# Altium PCB 火灾报警装置.PcbDoc
Units mil, origin at the board's own origin, x right, y up, seen from the top; angles counter-clockwise.
Board outline 5950 x 3885 mil, 2 copper layers (Top Layer, Bottom Layer); 33 components, 40 nets, 153 pads, 0 vias.
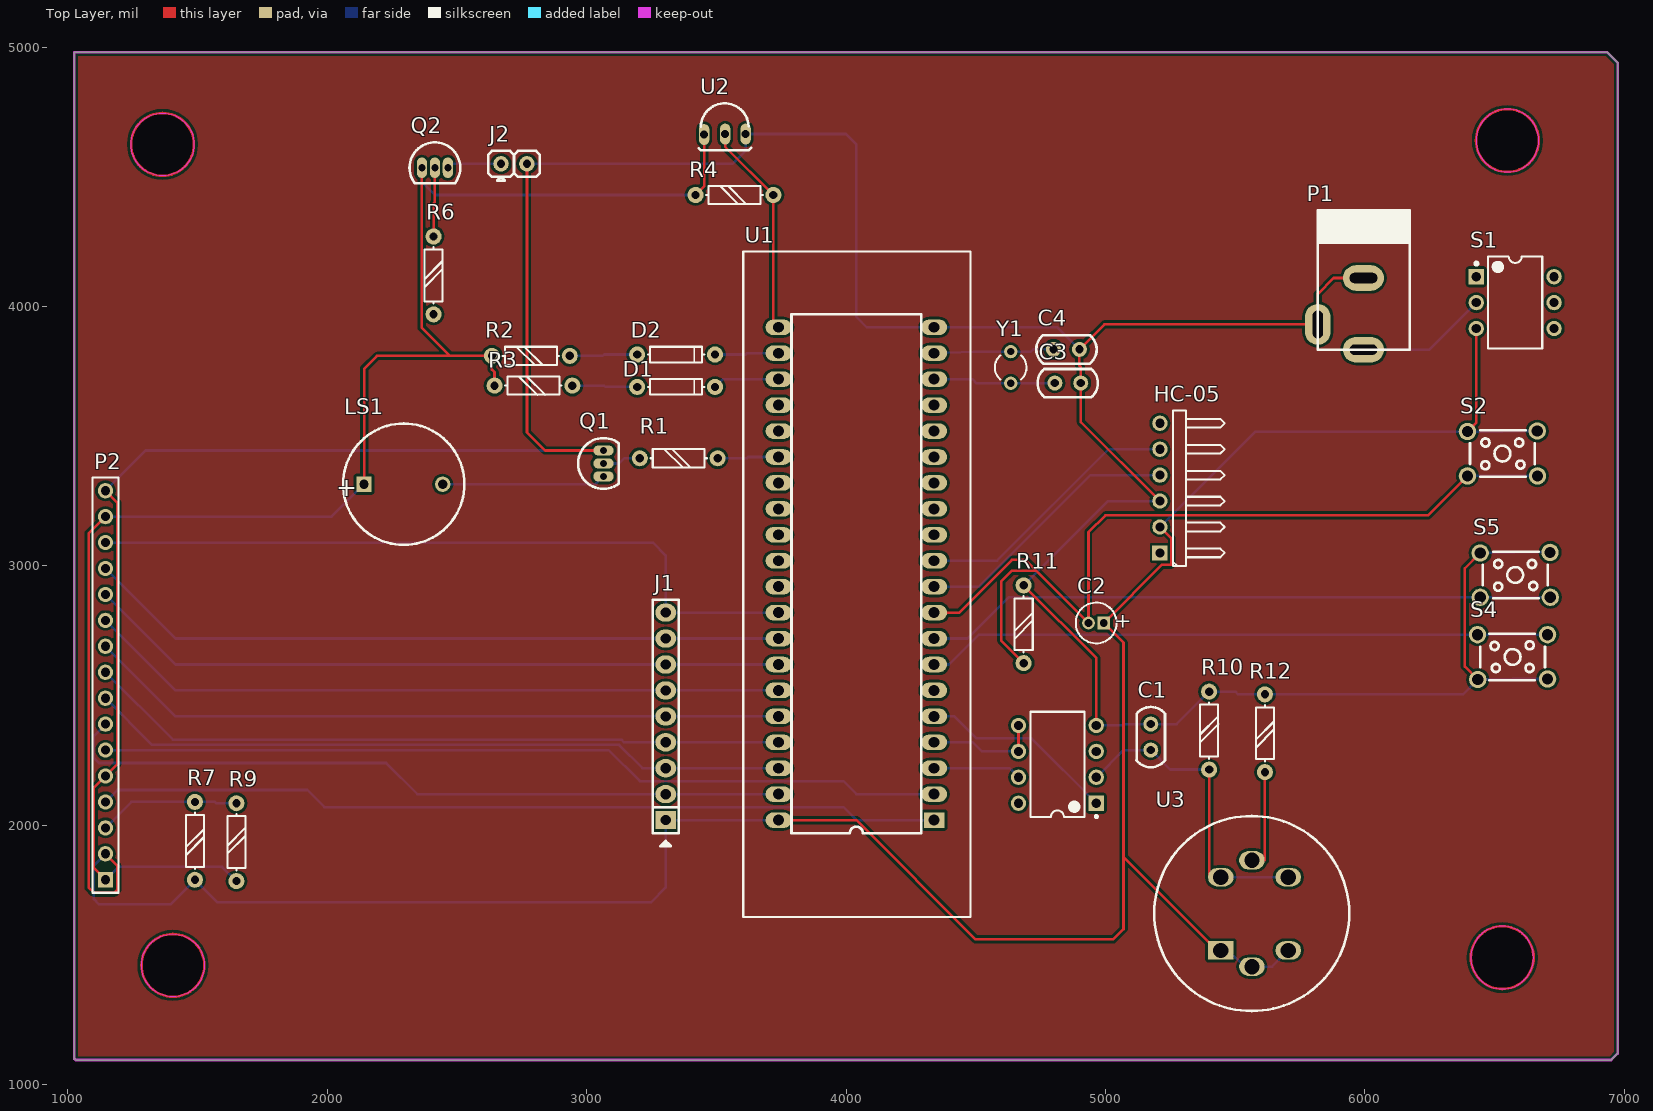
[diagram p0: Top Layer view]
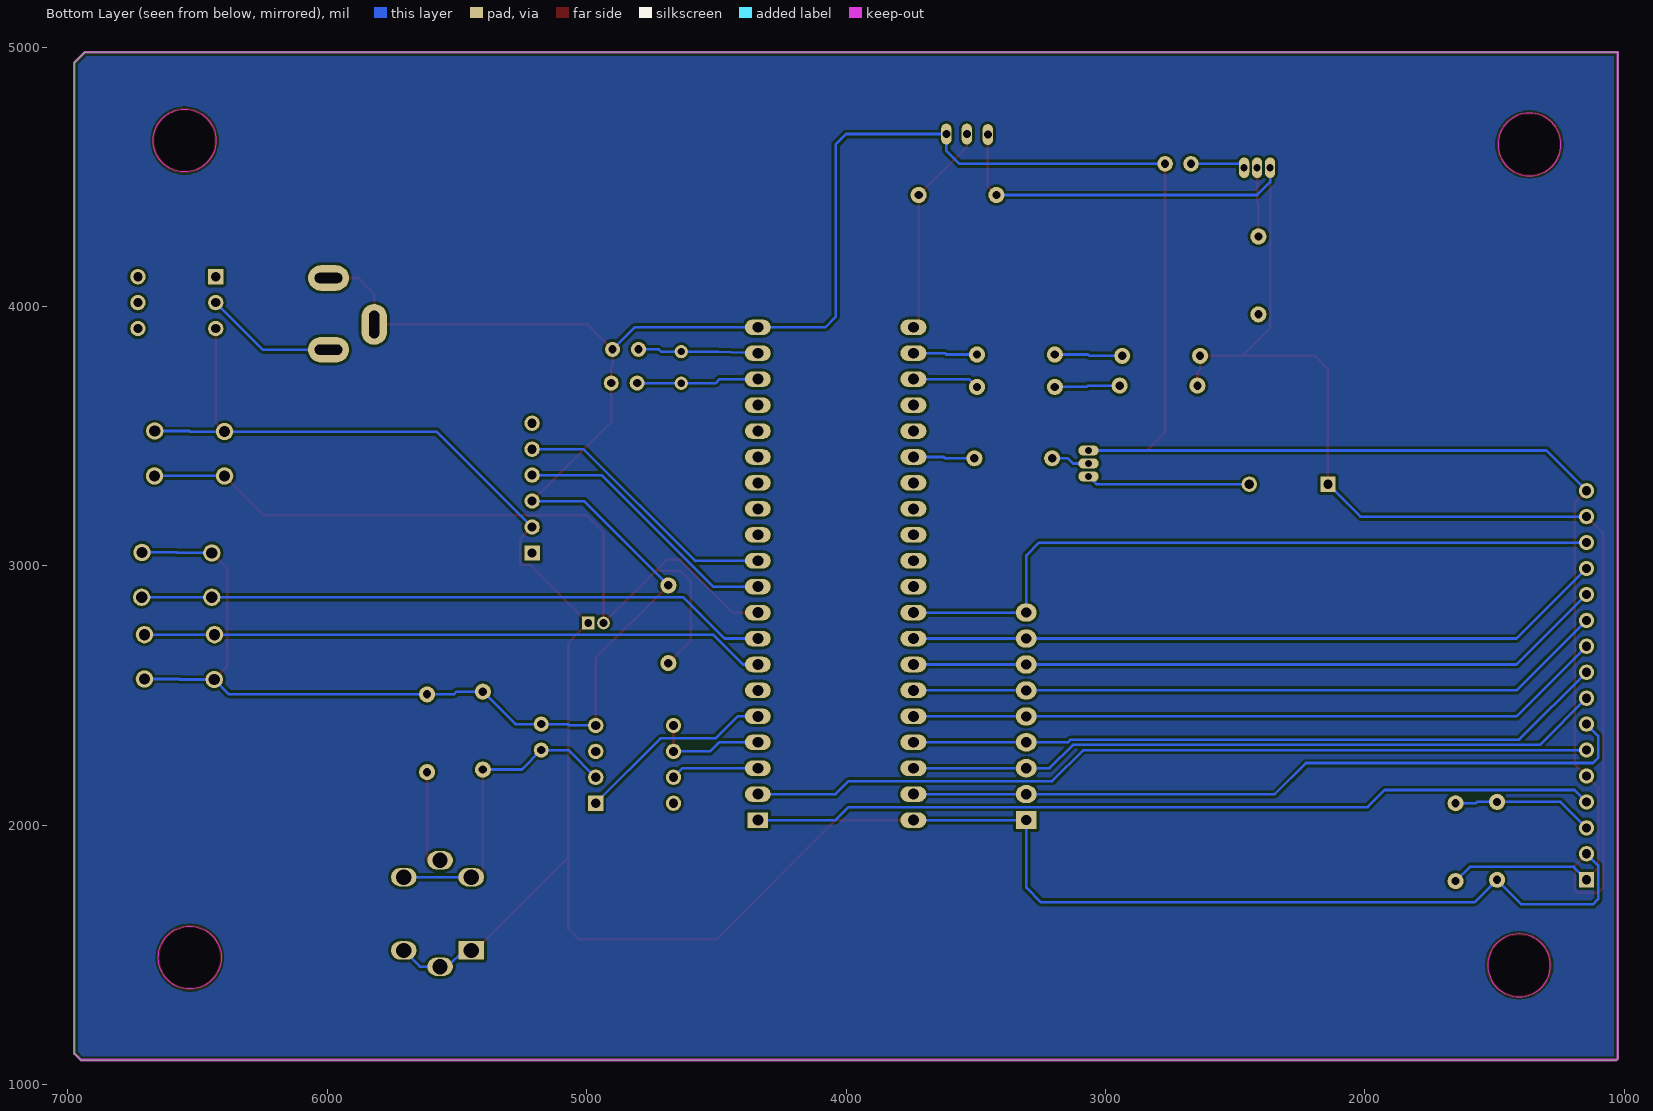
[diagram p1: Bottom Layer view, seen from below]
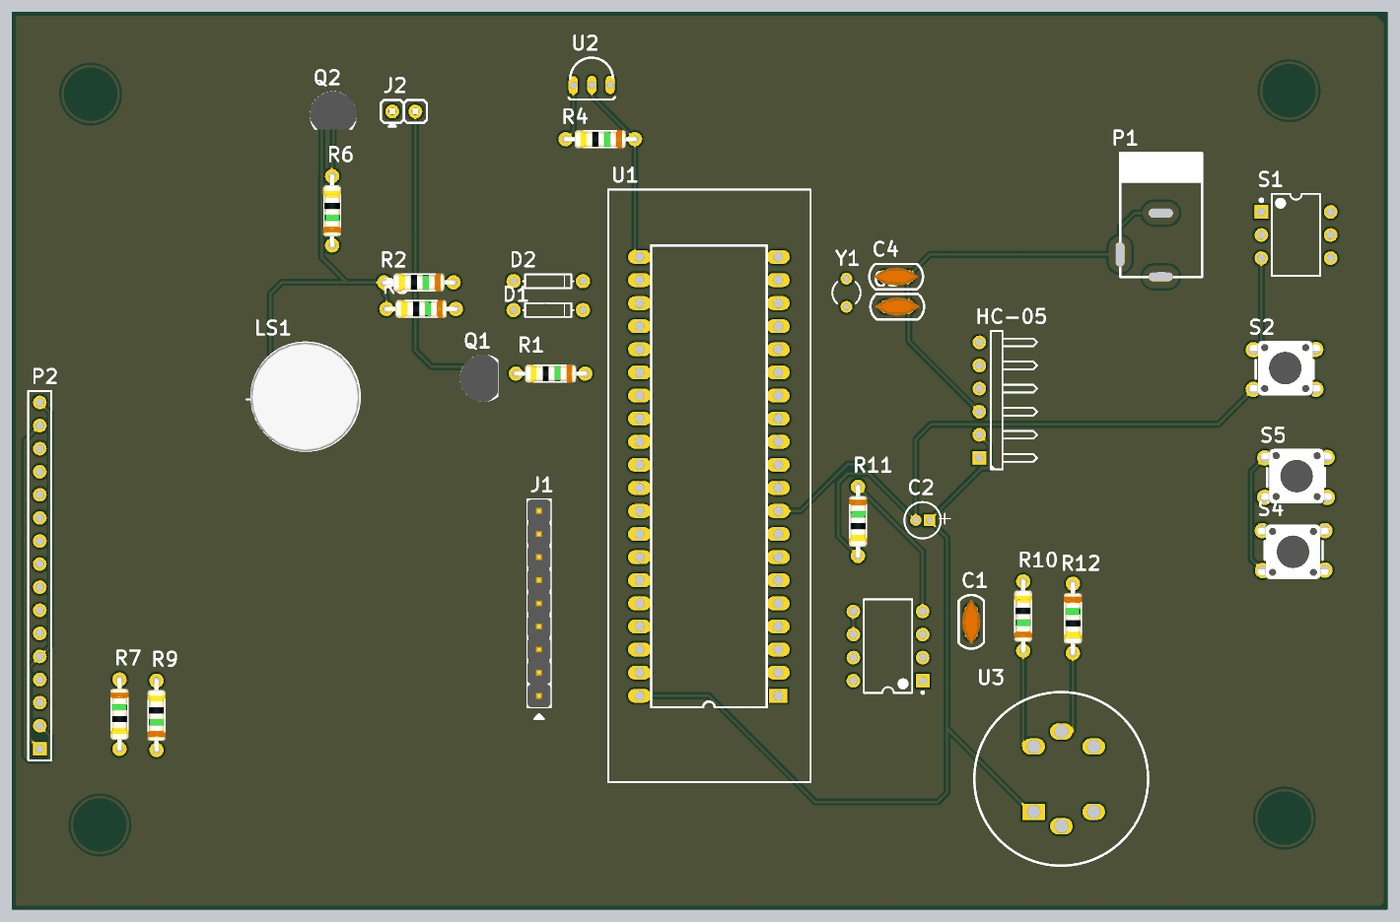
[diagram p2: 3D render of the assembled board from above, using the file's embedded part models]

## Layer stack, top to bottom
Top Solder: solder mask 0.4, Solder Resist, Dk 3.5
Top Layer: signal copper 1.4
Dielectric 1: dielectric 12.6, FR-4, Dk 4.8
Bottom Layer: signal copper 1.4
Bottom Solder: solder mask 0.4, Solder Resist, Dk 3.5

## Board outline
1030,1095 1025,1100 1025,4980 6935,4980 6975,4940 6975,1120 6950,1095
cut-out: 6408.96,1490 ccw(c6530,1490) 6530,1368.96 ccw(c6530,1490) 6651.04,1490 ccw(c6530,1490) 6530,1611.04 ccw(c6530,1490)
cut-out: 1405,1338.96 cw(c1405,1460) 1283.96,1460 cw(c1405,1460) 1405,1581.04 cw(c1405,1460) 1526.04,1460 cw(c1405,1460)
cut-out: 6428.96,4640 ccw(c6550,4640) 6550,4518.96 ccw(c6550,4640) 6671.04,4640 ccw(c6550,4640) 6550,4761.04 ccw(c6550,4640)
cut-out: 1365,4503.96 cw(c1365,4625) 1243.96,4625 cw(c1365,4625) 1365,4746.04 cw(c1365,4625) 1486.04,4625 cw(c1365,4625)

## Design rules (kind name [scope] priority, off if disabled: settings)
Clearance [All] p1: gap=10 ignorepadtopadclearanceinfootprint=FALSE except(0: Arc-Hole Track-Hole SMDPad-Hole THPad-Hole Via-Hole Fill-Hole Poly-Hole Region-Hole Text-Hole)
PolygonConnect [All] p1: connectstyle=Relief reliefconductorwidth=10 reliefentries=4 polygonreliefangle="90 Angle" airgapwidth=10
RoutingVias [All] p1: holewidth=28 width=50 viastyle="Through Hole" minholewidth=28 minwidth=50 maxholewidth=28 maxwidth=50
SolderMaskExpansion [All] p1: expansion=4
Width [All] p1: maxlimit=10 minlimit=10 preferedwidth=10
30 further rules are at their usual default settings.

## Components (designator, comment, footprint, x,y, rotation, side; value= is the part's Value field where it differs from the comment)
C1 "Cap" CAP-0.1 5175,2340 r270 top value=104
C2 "Cap Pol1" CAPPR1.5-4X5 4964.53,2780 r180 top value=10uF
C3 "Cap" CAP-0.1 4855,3705 r180 top value=100pF
C4 "Cap" CAP-0.1 4850,3835 r180 top value=100pF
D1 "LED1" DIODE-0.3 3495,3690 r0 top
D2 "LED2" DIODE-0.3 3495,3815 r0 top
HC-05 "Header 6H" HDR1X6H 5210,3050 r90 top
J1 "10K" PIN-9-2.54-1.0 3305,2420 r90 top
J2 "接线端子" SIP-2 2720,4550 r0 top
LS1 "BUZZ" BUZZER_12*9.5 2445,3315 r180 top
P1 "POWER" 7257-3 5995,4110 r0 top
P2 "1602" HDR1X16 1145,1790 r90 top
Q1 "9012" TO-92(TO-92-3) 3065,3395 r90 top
Q2 "8550" TO-92(TO-92-3) 2415,4535 r0 top
R1 "2.2K" AXIAL-0.3 3505,3415 r180 top
R2 "1K" AXIAL-0.3 2935,3810 r180 top
R3 "2.2K" AXIAL-0.3 2945,3695 r180 top
R4 "10K" AXIAL-0.3 3720,4430 r180 top
R6 "1K" AXIAL-0.3 2410,3970 r90 top
R7 "10K" AXIAL-0.3 1490,2090 r270 top
R9 "470" AXIAL-0.3 1650,1785 r90 top
R10 "470" AXIAL-0.3 5400,2215 r90 top
R11 "10K" AXIAL-0.3 4685,2925 r270 top
R12 "5.1" AXIAL-0.3 5615,2505 r270 top
S1 "SW DIP-3" DIP-6 6580,4015 r0 top
S2 "Tactile Switch" BUTTON_6*6 6395.63,3518 r0 top
S4 "Tactile Switch" BUTTON_6*6 6705,2564 r180 top
S5 "Tactile Switch" BUTTON_6*6 6445,3050 r0 top
U1 "89C51/52" "dip40 - 紧缩座" 4340,2020 r180 top
U2 "DS18B20" TO-92 3535,4665 r270 top
U3 "MQ-2" MQ-2 5575,1660 r0 top
Y1 "12MHZ" R38 4635,3765 r180 top
? "ADC0832" N08E 4815,2235 r180 top

## Footprints (in the part's own frame and the unit in brackets; to place one, negate y for a bottom-side part, rotate by r counter-clockwise, add the part's x,y. Pads: shape width x height; smd on the part's side, far side on the other; paste and mask are expansions set on the pad)
7257-3 [mm]
  oval 4x2.5 hole 1 slot 2.7 at 0 deg: 1(0,-7.018) 3(0,0)
  oval 2.5x4 hole 1 slot 2.7 at 90 deg: 2(-4.47,-4.547)
  silkscreen extent -4.47,-7.02 4.52,6.65
AXIAL-0.3 [mil] "1/8W电阻"
  round 62 hole 32: 1(0,0) 2(300,0)
  silkscreen extent 41,-35 259,35, body extent -10,-39 310,39, height 89
BUTTON_6*6 [mm] "轻触按键"
  round 1.7 hole 1.1: 1(0,0) 1(6.842,0.051) 2(0,-4.343) 2(6.867,-4.343)
  silkscreen extent 0.25,-4.44 6.6,0.13, body extent -0.48,-5.01 7.49,0.99, height 5.26
BUZZER_12*9.5 [mm] "12*9.5mm"
  rect 1.5x1.5 hole 0.9: 1(7.696,0)
  round 1.5 hole 0.9: 2(0,0)
  silkscreen extent -2.13,-5.94 9.75,5.94, body extent -2.14,-5.97 9.86,6.02, height 7.5
CAP-0.1 [mil] "瓷片电容"
  round 58 hole 31.5: 1(-50,0) 2(50,0)
  silkscreen extent -116,-55 116,55, body extent -97,-39 97,39, height 226
CAPPR1.5-4X5 [mm]
  rect 1.25x1.25 hole 0.75: 1(-0.75,0)
  round 1.25 hole 0.75: 2(0.75,0)
  silkscreen extent -2,-2 2,2, body extent -2,-2 2,2, height 5
DIODE-0.3 [mil]
  round 62 hole 32: 1(-300,0) 2(0,0)
  silkscreen extent -259,-30 -41,30
"dip40 - 紧缩座" [mil]
  rect 80x60 hole 42: 1(0,0)
  oval 100x60 hole 42: 2(0,-100) 3(0,-200) 4(0,-300) 5(0,-400) 6(0,-500) 7(0,-600) 8(0,-700) 9(0,-800) 10(0,-900) 11(0,-1000) 12(0,-1100) 13(0,-1200) 14(0,-1300) 15(0,-1400) 16(0,-1500) 17(0,-1600) 18(0,-1700) 19(0,-1800) 20(0,-1900) 21(600,-1900) 22(600,-1800) 23(600,-1700) 24(600,-1600) 25(600,-1500) 26(600,-1400) 27(600,-1300) 28(600,-1200) 29(600,-1100) 30(600,-1000) 31(600,-900) 32(600,-800) 33(600,-700) 34(600,-600) 35(600,-500) 36(600,-400) 37(600,-300) 38(600,-200) 39(600,-100) 40(600,0)
  silkscreen extent -140,-2192 736,374
DIP-6 [mm]
  rect 1.5x1.5 hole 0.9: 1(-3.81,2.54)
  round 1.5 hole 0.9: 2(-3.81,0) 3(-3.81,-2.54) 4(3.81,-2.54) 5(3.81,0) 6(3.81,2.54)
  silkscreen extent -3.95,-4.5 2.65,4.53
HDR1X6H [mm] "Connector; Header; 6 Position; Right Angle"
  rect 1.5x1.5 hole 0.9: 1(0,0)
  round 1.5 hole 0.9: 2(2.54,0) 3(5.08,0) 4(7.62,0) 5(10.16,0) 6(12.7,0)
  silkscreen extent -1.27,-6.35 13.97,-1.27
HDR1X16 [mm] "Connector; Header; 16 Position"
  rect 1.5x1.5 hole 0.9: 1(0,0)
  round 1.5 hole 0.9: 2(2.54,0) 3(5.08,0) 4(7.62,0) 5(10.16,0) 6(12.7,0) 7(15.24,0) 8(17.78,0) 9(20.32,0) 10(22.86,0) 11(25.4,0) 12(27.94,0) 13(30.48,0) 14(33.02,0) 15(35.56,0) 16(38.1,0)
  silkscreen extent -1.27,-1.27 39.37,1.27
MQ-2 [mm] "MQ-2烟雾传感器"
  rect 2.5x1.8 hole 1.5: 1(-3.302,-3.617)
  oval 2.5x1.8 hole 1.5: 2(-0.254,-5.207) 3(3.302,-3.617) 4(3.302,3.556) 5(-0.254,5.207) 6(-3.302,3.556)
  silkscreen extent -9.82,-9.55 9.27,9.55
N08E [mm] "DIP, 8-Leads, Row Spacing 7.62mm, Pitch 2.54mm, Body 9.91x6.35mm"
  rect 1.5x1.5 hole 0.9: 1(-3.81,3.81)
  round 1.5 hole 0.9: 2(-3.81,1.27) 3(-3.81,-1.27) 4(-3.81,-3.81) 5(3.81,-3.81) 6(3.81,-1.27) 7(3.81,1.27) 8(3.81,3.81)
  silkscreen extent -3.94,-5.15 2.65,5.23, body extent -3.6,-5.15 3.6,5.15, height 5.34
PIN-9-2.54-1.0 [mil] "Pin Header"
  rect 70x80 hole 39.37: 1(-400,0)
  oval 70x80 hole 39.37: 2(-300,0) 3(-200,0) 4(-100,0) 5(0,0) 6(100,0) 7(200,0) 8(300,0) 9(400,0)
  silkscreen extent -500,-50 450,50, body extent -450,-50 450,50, height 398
R38 [mm] "Crystal, Thru-Hole; 2 Leads; Body 3.1 x 8.2 mm (Dia.xH)"
  round 1.3 hole 0.7: 1(0,1.55) 2(0,-1.55)
  silkscreen extent -1.55,-1.19 1.55,1.17
SIP-2 [mil]
  round 60 hole 32: 1(-50,0) 2(50,0)
  silkscreen extent -100,-65 100,50, body extent -100,-50 100,50, height 336
TO-92 [mil] "EBC"
  oval 80x40 hole 30: 1(0,78) 2(0,-1) 3(2,-82)
  silkscreen extent -118,-102 63,99
TO-92(TO-92-3) [mm]
  oval 1x2 hole 0.7 mask+0.051: 1(-1.27,0) 2(0,0) 3(1.27,0)
  silkscreen extent -2.48,-1.5 2.48,2.48, body extent -2.61,-1.6 2.61,2.6, height 8

## Part data
C1 C3 C4: "Capacitor", LatestRevisionDate=17-Jul-2002, LatestRevisionNote="Re-released for DXP Platform.", PackageDescription="Radial Cap, Thru-Hole; 2 Leads; 0.3 in Pin Spacing", PackageReference=RAD-0.3, Published=8-Jun-2000, Publisher="Altium Limited"
C2: "Polarized Capacitor (Radial)", LatestRevisionDate=17-Jul-2002, LatestRevisionNote="Re-released for DXP Platform.", PackageDescription="Polarized Capacitor (Radial); 2 Leads", PackageReference=RB7.6-15, Published=8-Jun-2000, Publisher="Altium Limited"
D1 D2: library part LED0, "Typical INFRARED GaAs LED", LatestRevisionDate=08-Jul-2005, LatestRevisionNote="Mech Layer 1 removed.", PackageDescription="LED; 2 Leads", PackageReference=LED-0, Published=8-Jun-2000, Publisher="Altium Limited"
HC-05: "Header, 6-Pin, Right Angle", LatestRevisionDate=17-Jul-2002, LatestRevisionNote="Re-released for DXP Platform.", Publisher="Altium Limited"
J1: library part CON9, "Connector"
J2: library part CON2, "Connector"
LS1: "蜂鸣器"
P2: library part "Header 16", "Header, 16-Pin", LatestRevisionDate=17-Jul-2002, LatestRevisionNote="Re-released for DXP Platform.", Publisher="Altium Limited"
Q1: library part 9012_TO-92, "PNP型小功率三极管", datasheet=http://pdf1.alldatasheetcn.com/datasheet-pdf/view/311757/DAYA/9012.html
Q2: library part 8550_TO-92, "PNP型小功率三极管", HelpURL=https://baike.baidu.com/item/%E4%B8%89%E6%9E%81%E7%AE%A18550/862606
R1 R2 R3 R4 R6 R7 R9 R10 R11 R12: library part R
S1: "DIP Switch, 3 Position, SPST", Code_JEDEC=MO-001-AM, LatestRevisionDate=17-Jul-2002, LatestRevisionNote="Re-released for DXP Platform.", PackageReference=DIP-6, Published=24-Mar-1999, Publisher="Altium Limited"
S2 S4 S5: library part SW-PB, "Tactile Switch触觉开关", LatestRevisionDate=17-Jul-2002, LatestRevisionNote="Re-released for DXP Platform.", PackageReference=SPST-2, Published=24-Mar-1999, Publisher="Altium Limited"
U1: library part AT89C51
U3: "MQ-2 气体传感器"
Y1: library part XTAL, "Crystal Oscillator", LatestRevisionDate=17-Jul-2002, LatestRevisionNote="Re-released for DXP Platform.", PackageDescription="Crystal, Thru-Hole; 2 Leads; Body 3.1 x 8.2 mm (Dia.xH)", PackageReference=R38, Published=8-Jun-2000, Publisher="Altium Limited"

## Nets (pads, with @x,y where several pads share a name; then routed paths per layer and width w, separated by ;. In a path a pad name is that pad's centre, name@x,y a point inside that pad or via, vN(x,y) a via of type N, cw(c..) or ccw(c..) an arc to the next point about the centre after c; other vN are vias at no path point)
GND: ?.4 C1.1 C3.1 C4.1 HC-05.3 J2.2 P1.2 P1.3 P2.1 P2.5 P2.16 Q1.3 R9.1 R10.2 R11.1 R12.1 S4.1 S5.1 U1.20 U2.1 | length 14348
  Top Layer w10: P2.1 1100,1835 1100,2145 P2.5 1190,2235 1190,3245 P2.16 ; J2.2 2770,3515 2840,3445 Q1.3 ; R11.1 4965,2645 ?.4 ; HC-05.3 4905,3555 C3.1 4905,3767 4900,3772 C4.1 4996,3931 P1.2 5819,4049 5880,4110 P1.3 ; S4.1@6435.63,2562 6386,2611.63 6386,2991 S5.1@6445,3050
  Bottom Layer w10: P2.1 1195,1840 1595,1840 R9.1 ; P2.16 1300,3445 Q1.3 ; J2.2 3563,4550 3613,4600 U2.1 4000,4665 4040,4625 4040,3960 4080,3920 U1.20 4815,3920 C4.1 ; R11.1 5010,3250 HC-05.3 ; ?.4 5067,2385 5072,2390 C1.1 5275,2390 R10.2 5502,2515 5512,2505 R12.1 6378.63,2505 6435.63,2562 6569,2562 6571,2564 S4.1@6705,2564 ; S5.1@6445,3050 6578,3050 6580,3052 S5.1@6714.37,3052
Net_1: ?.1 U1.5 | length 763.8
  Bottom Layer w10: U1.5 4418,2420 4503,2335 4715,2335 ?.1
Net_2: ?.2 C1.2 R10.1 U3.4 U3.6 | length 1229.6
  Top Layer w10: R10.1 5400,1800 U3.6
  Bottom Layer w10: ?.2 5070,2290 C1.2 5250,2215 R10.1 ; U3.6 U3.4
Net_5: ?.5 ?.6 U1.4 | length 439.5
  Top Layer w10: ?.6 ?.5
  Bottom Layer w10: U1.4 4489,2320 4524,2285 ?.6
Net_7: ?.7 U1.3 | length 339.5
  Bottom Layer w10: U1.3 4630,2220 ?.7
NetC2_2: C2.2 R11.2 S2.2 U1.9 | length 3453.2
  Top Layer w10: U1.9 4437,2820 4640,3023 4692,3023 4733,2982 ; R11.2 4599,2711 4599,2941 4640,2982 4733,2982 ; S2.2@6395.63,3347 6243.63,3195 5000,3195 4935,3130 C2.2 4733,2982
  Bottom Layer w10: S2.2@6395.63,3347 S2.2@6666,3347
NetC3_2: C3.2 U1.18 Y1.1 | length 472.1
  Bottom Layer w10: U1.18 4487,3720 4503.02,3703.98 Y1.1 4719,3703.98 4720.02,3705 C3.2
NetC4_2: C4.2 U1.19 Y1.2 | length 463.8
  Bottom Layer w10: U1.19 4493.02,3826.02 Y1.2 4713,3826.02 4721.98,3835 C4.2
NetD1_1: D1.1 R3.1 | length 252.1
  Bottom Layer w10: R3.1 3067,3695 3072,3690 D1.1
NetD1_2: D1.2 U1.23 | length 257.4
  Bottom Layer w10: D1.2 3525,3720 U1.23
NetD2_1: D2.1 R2.1 | length 262.1
  Bottom Layer w10: R2.1 3062,3810 3067,3815 D2.1
NetD2_2: D2.2 U1.22 | length 247.1
  Bottom Layer w10: D2.2 3613,3815 3618,3820 U1.22
NetHC-05_4: HC-05.4 U1.10 | length 1048.1
  Bottom Layer w10: U1.10 4512,2920 4942,3350 HC-05.4
NetHC-05_5: HC-05.5 U1.11 | length 1048.1
  Bottom Layer w10: U1.11 4583,3020 5013,3450 HC-05.5
NetJ1_2: J1.2 P2.7 U1.39 | length 2846.6
  Bottom Layer w10: P2.7 1100,2345 1100,2260 1120,2240 2227,2240 2347,2120 J1.2 U1.39
NetJ1_3: J1.3 P2.8 U1.38 | length 2706.8
  Bottom Layer w10: P2.8 1325,2310 3125,2310 3215,2220 J1.3 U1.38
NetJ1_4: J1.4 P2.9 U1.37 | length 2706.8
  Bottom Layer w10: P2.9 1405,2330 3134,2330 3144,2320 J1.4 U1.37
NetJ1_5: J1.5 P2.10 U1.36 | length 2706.8
  Bottom Layer w10: P2.10 1415,2420 J1.5 U1.36
NetJ1_6: J1.6 P2.11 U1.35 | length 2706.8
  Bottom Layer w10: P2.11 1415,2520 J1.6 U1.35
NetJ1_7: J1.7 P2.12 U1.34 | length 2706.8
  Bottom Layer w10: P2.12 1415,2620 J1.7 U1.34
NetJ1_8: J1.8 P2.13 U1.33 | length 2706.8
  Bottom Layer w10: P2.13 1415,2720 J1.8 U1.33
NetJ1_9: J1.9 P2.14 U1.32 | length 2835.7
  Bottom Layer w10: P2.14 3255,3090 3305,3040 J1.9 U1.32
NetJ2_1: J2.1 Q2.3 | length 220
  Bottom Layer w10: Q2.3 2465,4550 J2.1
NetLS1_2: LS1.2 Q1.1 | length 632.4
  Bottom Layer w10: LS1.2 3035,3315 Q1.1
NetP1_1: P1.1 S1.2 | length 510.1
  Bottom Layer w10: P1.1 6248.69,3833.69 S1.2
NetP2_3: P2.3 R7.1 R9.2 | length 548.5
  Bottom Layer w10: P2.3 1245,2090 R7.1 1567,2090 1572,2085 R9.2
NetP2_4: P2.4 U1.1 | length 3262.1
  Bottom Layer w10: P2.4 1191,2136 1923,2136 1989,2070 3990,2070 4040,2020 U1.1
NetP2_6: P2.6 U1.2 | length 3265.4
  Bottom Layer w10: P2.6 3085,2290 3205,2170 3990,2170 4040,2120 U1.2
NetQ1_2: Q1.2 R1.2 | length 148.3
  Bottom Layer w10: Q1.2 3125,3395 3145,3415 R1.2
NetQ2_2: Q2.2 R6.2 | length 267.1
  Top Layer w10: R6.2 2410,4398 2415,4403 Q2.2
NetQ3_2: 
NetQ3_3: R6.1
NetR1_1: R1.1 U1.26 | length 237.1
  Bottom Layer w10: R1.1 3618,3415 3623,3420 U1.26
NetR4_1: R4.1 U1.21 U2.2 | length 842
  Top Layer w10: U2.2 3534,4616 R4.1 3720,3920 U1.21
NetR8_2: U1.15
NetR12_2: R12.2 U3.5 | length 390
  Top Layer w10: U3.5 5615,1865 R12.2
NetS3_2: U1.6
NetS4_2: S4.2 U1.7 | length 2412.6
  Bottom Layer w10: U1.7 4397,2620 4512,2735 6434.63,2735 S4.2@6705,2735
NetS5_2: S5.2 U1.8 | length 2441.2
  Bottom Layer w10: U1.8 4468,2720 4627,2879 6445,2879 S5.2@6715.37,2879
VCC: C2.1 HC-05.2 J1.1 LS1.1 P2.2 P2.15 Q2.1 R2.2 R3.2 R4.2 R7.2 S1.3 S2.1 U1.40 U2.3 U3.1 U3.2 U3.3 | length 15335.7
  Top Layer w10: P2.2 1190,1845 1190,1750 1180,1740 1100,1740 1080,1760 1080,3125 P2.15 ; LS1.1 2142,3760 2192,3810 2473,3810 ; Q2.1 2365,4281 2364,4280 2364,3919 2473,3810 ; R3.2 2645,3747 2635,3757 R2.2 2473,3810 ; R4.2 3453,4463 U2.3 ; U1.40 4040,2020 4500,1560 5030,1560 5070,1600 5070,1878.6 ; HC-05.2 5255,3105 5255,3005 5219.06,3005 C2.1 5070,2704.06 5070,1878.6 ; U3.1 5431,1517.6 5070,1878.6 ; S2.1@6395.63,3518 6430,3552.37 S1.3
  Bottom Layer w10: P2.2 1100,1845 1100,1715 1120,1695 1395,1695 R7.2 1577,1703 3248,1703 3305,1760 J1.1 U1.40 ; P2.15 2017,3190 LS1.1 ; Q2.1 2365,4480 2415,4430 R4.2 ; HC-05.2 5578,3518 6395.63,3518 6529,3518 6531,3520 S2.1@6665,3520 ; U3.1 5473,1517.6 5535.6,1455 U3.2 5642.4,1455 U3.3
pads on no net: ?.3 ?.8 HC-05.1 HC-05.6 S1.1 S1.4 S1.5 S1.6 U1.12 U1.13 U1.14 U1.16 U1.17 U1.24 U1.25 U1.27 U1.28 U1.29 U1.30 U1.31
copper on no net: | length 3042
  Top Layer w10: 1486.04,4625 ccw(c1365,4625) 1486.04,4625 ; 1526.04,1460 ccw(c1405,1460) 1526.04,1460 ; 6651.04,1490 ccw(c6530,1490) 6651.04,1490 ; 6671.04,4640 ccw(c6550,4640) 6671.04,4640

## Polygon pours and split planes (outlines as drawn)
no net on Top Layer "Keep-Out Layer-No Net" (solid, pour order 8): 1025,4970 1035,4980 6940,4980 6985,4935 6962.5,4912.5 6962.5,1107.5 1032.5,1107.5 1025,1100
no net on Bottom Layer "Keep-Out Layer-No Net" (solid, pour order 10): 1025,4980 6935,4980 6975,4940 6975,1120 6950,1095 1030,1095

## Keep-outs
Keep-Out Layer:
  the board outline again, w10

## Text inside footprints (layer, text, board x,y; h text height)
C2: Top Overlay "+" at 5101.34,2809.53 h59.06 r180
LS1: Top Overlay "+" at 2115,3330 h70 r180